# Altium PCB PCB_Capacitive-Soil-Moisture-Sensor_2024-11-25.pcbdoc
Units mil, origin at the board's own origin, x right, y up, seen from the top; angles counter-clockwise.
Board outline 2700 x 9282.02 mil, 2 copper layers (Top Layer, Bottom Layer); 89 components, 70 nets, 363 pads, 106 vias.
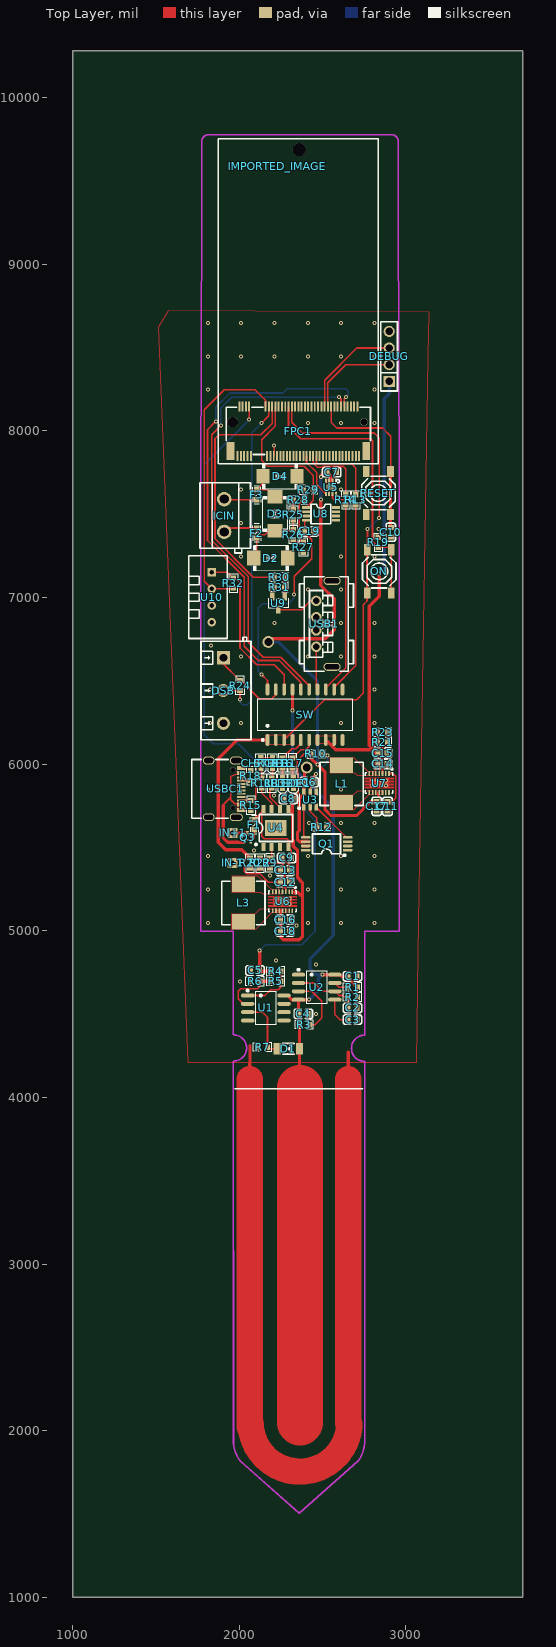
[diagram p0: Top Layer view]
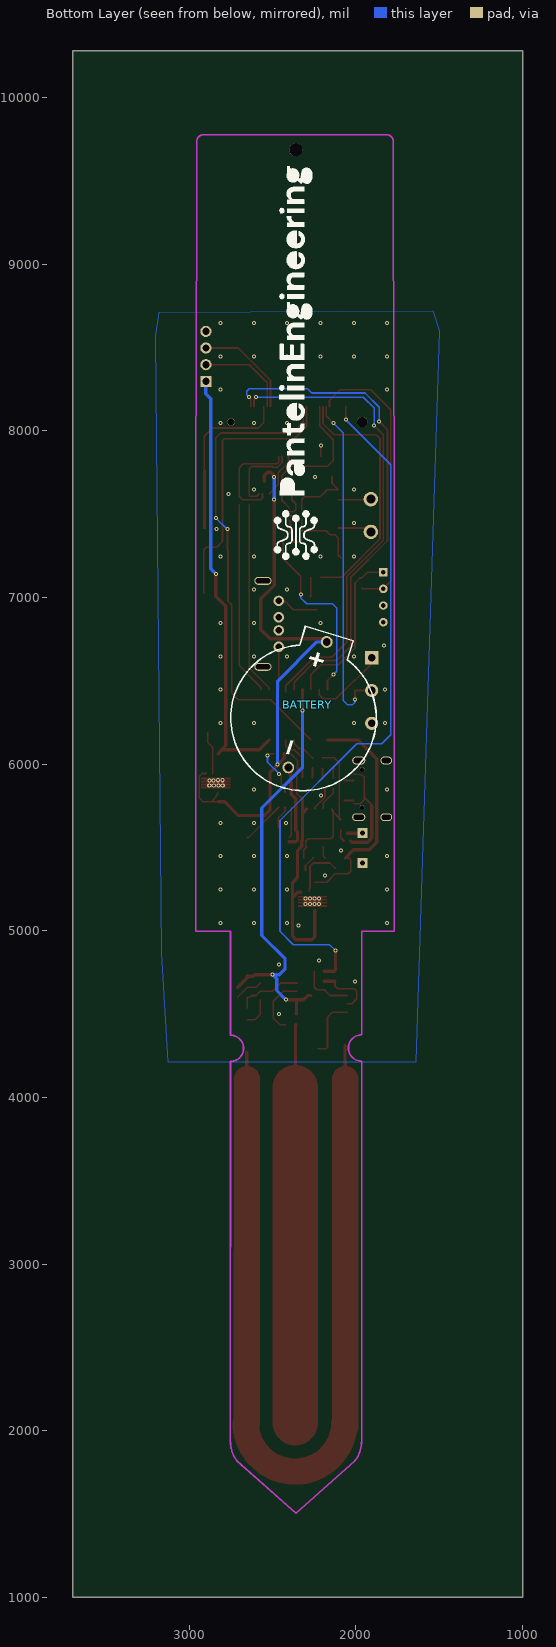
[diagram p1: Bottom Layer view, seen from below]

## Layer stack, top to bottom
Top Layer: signal copper (thickness not stored)
Dielectric: dielectric 12.6, FR-4, Dk 4.8
Bottom Layer: signal copper (thickness not stored)

## Board outline
3700,1000 1000,1000 1000,10282.02 3700,10282.02

## Components (designator, comment, footprint, x,y, rotation, side; value= is the part's Value field where it differs from the comment)
BATTERY "BS-02-A1AJ010" BAT-TH_BS-02-A1AJ010 2290,6357.02 r287 bottom
C1 "100nF" C0603 2680,4727.02 r0 top
C2 "470pF" C0603 2680,4537.02 r0 top
C3 "10nF" C0603 2680,4467.02 r0 top
C4 "100nF" C0603 2385,4502.02 r180 top
C5 "4.7uF" C0603 2095,4762.02 r0 top
C6 "100n" C0603 2420,5892.02 r0 top
C7 "100n" C0603 2555,7752.02 r180 top
C8 "10u" C0603 2295,5792.02 r0 top
C9 "10u" C0603 2285,5437.02 r0 top
C10 "100n" C0603 2910,7392.02 r90 top
C11 "10uF" C0603 2890,5747.02 r90 top
C12 "22u" C0603 2275,5292.02 r180 top
C13 "22u" C0603 2275,5362.02 r180 top
C14 "22u" C0603 2860,6002.02 r180 top
C15 "22u" C0603 2860,6067.02 r180 top
C16 "10u" C0603 2275,5067.02 r0 top
C17 "100n" C0603 2825,5747.02 r270 top
C18 "100n" C0603 2275,4997.02 r0 top
C19 "100n" C0603 2420,7397.02 r0 top
CHRG1 "FC-DA1608BK-470H10" LED0603-RD 2130,6007.02 r90 top
D1 "TCLL4148" LL-34_L3.5-W1.5-RD 2295,4292.02 r0 top
D2 "SMBJ5.0CA_C726851" SMB_L4.6-W3.6-LS5.3-BI 2190,7237.02 r0 top
D3 "SMBJ5.0CA_C726851" SMB_L4.6-W3.6-LS5.3-BI 2215,7502.02 r270 top
D4 "SMBJ5.0CA_C726851" SMB_L4.6-W3.6-LS5.3-BI 2245,7727.02 r180 top
DEBUG "2.54-1*4P母" HDR-TH_4P-P2.54-V-F 2900,8447.02 r90 top
DSB "MX301-5.0-03P-BU01-CU-Y-A" CONN-TH_3P-P5.0-MX301-5.0-03P-BU01-CU-Y-A 1905,6442.02 r270 top
F1 "1.25A" F0603 2090,5637.02 r90 top
F2 "JK-SMD0603-001" F0603 2105,7387.02 r270 top
F3 "JK-SMD0603-001" F0603 2105,7617.02 r90 top
FPC1 "AS0BC21-S30BM-7H" CONN-SMD_AS0BC21-S30BM-7H 2355,7997.02 r180 top
ICIN "VLT" CONN-TH_P5.00_KF301-5.0-2P 1910,7492.02 r270 top
IMPORTED_IMAGE "IMPORTED_IMAGE" IMPORTED_IMAGE 2228.28,9588.14 r0 top
IN+1 "Pad 01" CON_PAD_SQUARE_32MIL 1960,5587.02 r0 top
IN-1 "Pad 02" CON_PAD_SQUARE_32MIL 1960,5407.02 r0 top
L1 "1.5u" IND-SMD_L7.2-W6.6_GPSR0730 2615,5882.02 r270 top
L3 "1.5uH" IND-SMD_L7.2-W6.6_GPSR0730 2025,5167.02 r270 top
LEDB1 "FC-DA1608BK-470H10" LED0603-RD 2260,5887.02 r90 top
LEDE1 "XL-1608UGC-04" LED0603-RD_GREEN 2325,5887.02 r90 top
ON "TS-1187A-B-A-B" SW-SMD_4P-L5.1-W5.1-P3.70-LS6.5-TL-2 2840,7157.02 r90 top
Q1 "FS8205A" TSSOP-8_L4.4-W3.5-P0.65-LS6.4-BL 2525,5522.02 r90 top
Q3 "NTA4151PT1G" SOT-416_L1.6-W0.8-P1.00-LS1.6-BR 2050,5562.02 r270 top
R1 "1.5kΩ" R0603 2680,4662.02 r0 top
R2 "2.4kΩ" R0603 2680,4602.02 r0 top
R3 "10kΩ" R0603 2390,4437.02 r0 top
R4 "100Ω" R0603 2220,4757.02 r0 top
R5 "0Ω" R0603 2220,4697.02 r0 top
R6 "DNP" R0603 2095,4697.02 r0 top
R7 "1MΩ" R0603 2140,4302.02 r0 top
R8 "1k" R0603 2195,5887.02 r270 top
R9 "1.6k" R0603 2185,5407.02 r90 top
R10 "100" R0603 2460,6062.02 r180 top
R11 "1k" R0603 2135,5887.02 r270 top
R12 "1k" R0603 2495,5622.02 r0 top
R13 "10k" R0603 2700,7587.02 r270 top
R14 "10k" R0603 2640,7587.02 r270 top
R15 "5.1kΩ" R0603 2070,5752.02 r90 top
R16 "49.9" R0603 2260,6007.02 r90 top
R17 "49.9" R0603 2320,6007.02 r90 top
R18 "5.1kΩ" R0603 2070,5932.02 r270 top
R19 "430" R0603 2835,7332.02 r270 top
R20 "1M" R0603 2065,5407.02 r270 top
R21 "1.6M" R0603 2860,6132.02 r0 top
R22 "180k" R0603 2125,5407.02 r270 top
R23 "180k" R0603 2860,6192.02 r0 top
R24 "4.7kΩ" R0603 2005,6472.02 r90 top
R25 "120Ω" R0603 2325,7497.02 r270 top
R26 "100kΩ" R0603 2325,7377.02 r90 top
R27 "100kΩ" R0603 2385,7302.02 r90 top
R28 "100kΩ" R0603 2355,7587.02 r0 top
R29 "100kΩ" R0603 2415,7647.02 r180 top
R30 "220" R0603 2240,7122.02 r0 top
R31 "10k" R0603 2240,7062.02 r0 top
R32 "4.7kΩ" R0603 1965,7087.02 r270 top
RESET "TS-1187A-B-A-B" SW-SMD_4P-L5.1-W5.1-P3.70-LS6.5-TL-2 2835,7627.02 r270 top
STDB1 "FC-DA1608HRK-620D" LED0603-RD_RED 2200,6007.02 r90 top
SW "DSHP10TS-S" SW-SMD_DSHP10TS-S 2395,6297.02 r0 top
U1 "LMV358IDR" SOIC-8_L4.9-W3.9-P1.27-LS6.0-BL 2160,4537.02 r270 top
U2 "NE555" SOIC-8_L4.9-W3.9-P1.27-LS6.0-BL 2465,4662.02 r270 top
U3 "DW01A" SOT-23-6_L2.9-W1.6-P0.95-LS2.8-BL 2425,5787.02 r0 top
U4 "TP4056" ESOP-8_L4.9-W3.9-P1.27-LS6.0-BL-EP 2220,5617.02 r0 top
U5 "MAX17048" DFN-8 2550,7662.02 r180 top
U6 "TPS63020DSJR" VSON-14_L4.0-W3.0-P0.50-BL-EP_TI_DSJ 2260,5177.02 r180 top
U7 "TPS63020DSJR" VSON-14_L4.0-W3.0-P0.50-BL-EP_TI_DSJ 2840,5887.02 r180 top
U8 "TP5552-VR" SOP-8_L3.0-W3.0-P0.65-LS4.9-BL 2490,7502.02 r270 top
U9 "IRLML6244TR" SOT-23-3_L2.9-W1.3-P1.90-LS2.4-BR 2235,6967.02 r90 top
U10 "DHT11" SENSOR-TH_DHT11 1835,7002.02 r270 top
USB1 "AF 180°ZJB13.7" USB-A-TH_AF-ZJB13.7 2510,6842.02 r90 top
USBC1 "TYPE-C-31-M-12" USB-C_SMD-TYPE-C-31-M-12 1915,5852.02 r270 top

## Footprints (in the part's own frame and the unit in brackets; to place one, negate y for a bottom-side part, rotate by r counter-clockwise, add the part's x,y. Pads: shape width x height; smd on the part's side, far side on the other; paste and mask are expansions set on the pad)
BAT-TH_BS-02-A1AJ010 [mm]
  round 1.8 hole 1.2 paste+0 mask+0.051: 1(10,0) 2(-10,0)
  silkscreen extent -11.36,-11.09 13.19,11.09
C0603 [mm]
  rect 0.8x0.9 smd paste+0 mask+0.051: 1(-0.7,0) 2(0.7,0)
  silkscreen extent -1.41,-0.71 1.39,0.72
CON_PAD_SQUARE_32MIL [mil]
  rect 60x60 hole 32 paste+0 mask+2: P(0,0)
CONN-SMD_AS0BC21-S30BM-7H [mm]
  rect 0.3x1.55 smd paste+0 mask+0.05: 1(9.25,3.775) 2(9,-3.775) 3(8.75,3.775) 4(8.5,-3.775) 5(8.25,3.775) 6(8,-3.775) 7(7.75,3.775) 8(7.5,-3.775) 9(7.25,3.775) 18(5,-3.775) 19(4.75,3.775) 20(4.5,-3.775) 21(4.25,3.775) 22(4,-3.775) 23(3.75,3.775) 24(3.5,-3.775) 25(3.25,3.775) 26(3,-3.775) 27(2.75,3.775) 28(2.5,-3.775) 29(2.25,3.775) 30(2,-3.775) 31(1.75,3.775) 32(1.5,-3.775) 33(1.25,3.775) 34(1,-3.775) 35(0.75,3.775) 36(0.5,-3.775) 37(0.25,3.775) 38(0,-3.775) 39(-0.25,3.775) 40(-0.5,-3.775) 41(-0.75,3.775) 42(-1,-3.775) 43(-1.25,3.775) 44(-1.5,-3.775) 45(-1.75,3.775) 46(-2,-3.775) 47(-2.25,3.775) 48(-2.5,-3.775) 49(-2.75,3.775) 50(-3,-3.775) 51(-3.25,3.775) 52(-3.5,-3.775) 53(-3.75,3.775) 54(-4,-3.775) 55(-4.25,3.775) 56(-4.5,-3.775) 57(-4.75,3.775) 58(-5,-3.775) 59(-5.25,3.775) 60(-5.5,-3.775) 61(-5.75,3.775) 62(-6,-3.775) 63(-6.25,3.775) 64(-6.5,-3.775) 65(-6.75,3.775) 66(-7,-3.775) 67(-7.25,3.775) 68(-7.5,-3.775) 69(-7.75,3.775) 70(-8,-3.775) 71(-8.25,3.775) 72(-8.5,-3.775) 73(-8.75,3.775) 74(-9,-3.775) 75(-9.25,3.775)
  rect 1.2x2.75 smd paste+0 mask+0.05: 76(-10.35,3) 77(10.35,3)
  round 1.1 hole 1.1 unplated paste+0: ""(-10,-1.42)
  round 1.6 hole 1.6 unplated paste+0: ""(10,-1.42)
  silkscreen extent -11,-3.67 11,3.53
CONN-TH_3P-P5.0-MX301-5.0-03P-BU01-CU-Y-A [mm]
  rect 2x2 hole 1.2 paste+0 mask+0.051: 1(-5,0)
  round 2 hole 1.2 paste+0 mask+0.051: 2(0,0) 3(5,0)
  silkscreen extent -8.1,-3.4 7.5,4.2
CONN-TH_P5.00_KF301-5.0-2P [mm]
  round 2.2 hole 1.4 paste+0 mask+0.051: 1(-2.5,0) 2(2.5,0)
  silkscreen extent -5,-3.7 5.71,4
DFN-8 [mil]
  rect 11.8x27.6 smd paste+0 mask+2: P$1(-30,-39) P$2(-10,-39) P$3(10,-39) P$4(30,-39) P$5(30,39) P$6(10,39) P$7(-10,39) P$8(-30,39)
  rect 54.3x31.5 smd paste+0 mask+2: P$9(0,0)
  silkscreen extent -52,-46 -32,-26
ESOP-8_L4.9-W3.9-P1.27-LS6.0-BL-EP [mm]
  rect 0.6x1.2 smd paste+0 mask+0.051: 1(-1.905,-2.908) 2(-0.635,-2.908) 3(0.635,-2.908) 4(1.905,-2.908) 5(1.905,2.908) 6(0.635,2.908) 7(-0.635,2.908) 8(-1.905,2.908)
  rect 3.3x2.4 smd paste+0 mask+0.051: 9(0,0)
  silkscreen extent -3.2,-2.67 2.55,2.05
F0603 [mil]
  rect 31.75x34.02 smd paste-3937.01 mask+2: 1(-29.66,0) 2(29.65,0)
  silkscreen extent -55,-25 55,25
HDR-TH_4P-P2.54-V-F [mm]
  rect 1.7x1.7 hole 1.1 paste+0 mask+0.051: 1(-3.81,0)
  round 1.7 hole 1.1 paste+0 mask+0.051: 2(-1.27,0) 3(1.27,0) 4(3.81,0)
  silkscreen extent -5.29,-1.27 5.29,1.27
IMPORTED_IMAGE [mil]
IND-SMD_L7.2-W6.6_GPSR0730 [mm]
  rect 2.35x3.5 smd paste+0 mask+0.051: 1(-2.85,0) 2(2.85,0)
  silkscreen extent -3.3,-3.3 3.3,3.3
LED0603-RD [mm]
  rect 0.8x0.8 smd paste+0 mask+0.051: 1(-0.799,-0.003) 2(0.799,0.004)
  silkscreen extent -1.49,-0.75 1.39,0.76
LED0603-RD_GREEN [mm]
  rect 0.8x0.8 smd paste+0 mask+0.051: 1(-0.799,-0.003) 2(0.799,0.004)
  silkscreen extent -1.49,-0.75 1.39,0.76
LED0603-RD_RED [mm]
  rect 0.8x0.8 smd paste+0 mask+0.051: 1(-0.799,-0.003) 2(0.799,0.004)
  silkscreen extent -1.49,-0.75 1.39,0.76
LL-34_L3.5-W1.5-RD [mm]
  rect 1.1x1.7 smd paste+0 mask+0.051: 1(-1.7,0) 2(1.7,0)
  silkscreen extent -0.9,-0.8 0.9,0.8
R0603 [mil]
  rect 31.75x34.02 smd paste-3937.01 mask+2: 1(-29.66,0) 2(29.66,0)
  silkscreen extent -55,-26 55,26
SENSOR-TH_DHT11 [mil]
  rect 51x51 hole 28 paste+0 mask+2: 1(-150,0)
  round 51 hole 28 paste+0 mask+2: 2(-50,0) 3(50,0) 4(150,0)
  silkscreen extent -248,-138 248,93
SMB_L4.6-W3.6-LS5.3-BI [mil]
  rect 80.61x88.23 smd paste+0 mask+2: 1(-102.02,0) 2(102.02,0)
  silkscreen extent -105,-75 108,75
SOIC-8_L4.9-W3.9-P1.27-LS6.0-BL [mm]
  oval 0.588x2.045 smd paste+0 mask+0.051: 1(-1.905,-2.773) 2(-0.635,-2.773) 3(0.635,-2.773) 4(1.905,-2.773) 5(1.905,2.773) 6(0.635,2.773) 7(-0.635,2.773) 8(-1.905,2.773)
  silkscreen extent -2.8,-2.92 2.53,1.52
SOP-8_L3.0-W3.0-P0.65-LS4.9-BL [mm]
  rect 0.406x1.3 smd paste+0 mask+0.051: 1(-0.975,-2.25) 2(-0.325,-2.25) 3(0.325,-2.25) 4(0.975,-2.25) 5(0.975,2.25) 6(0.325,2.25) 7(-0.325,2.25) 8(-0.975,2.25)
  silkscreen extent -1.82,-2.66 1.52,1.51
SOT-23-3_L2.9-W1.3-P1.90-LS2.4-BR [mm]
  rect 1.25x0.7 smd paste+0 mask+0.051: 1(1,-0.95) 2(1,0.95) 3(-1,0)
  silkscreen extent -0.73,-1.53 0.73,1.53
SOT-23-6_L2.9-W1.6-P0.95-LS2.8-BL [mm]
  rect 0.532x1.072 smd paste+0 mask+0.051: 1(-0.95,-1.149) 2(0,-1.149) 3(0.95,-1.149) 4(0.95,1.149) 5(0,1.149) 6(-0.95,1.149)
  silkscreen extent -1.82,-1.45 1.54,0.89
SOT-416_L1.6-W0.8-P1.00-LS1.6-BR [mm]
  rect 0.7x0.4 smd paste+0 mask+0.051: 1(0.6,-0.508) 2(0.6,0.508) 3(-0.6,0)
  silkscreen extent -0.4,-0.85 0.4,0.85
SW-SMD_4P-L5.1-W5.1-P3.70-LS6.5-TL-2 [mm]
  rect 1.7x1 smd paste+0 mask+0.051: 1(-3.3,1.85) 2(3.3,1.85) 3(-3.3,-1.85) 4(3.3,-1.85)
  silkscreen extent -2.55,-2.55 2.55,2.55
SW-SMD_DSHP10TS-S [mm]
  oval 0.56x1.84 smd paste+0 mask+0.051: 1(-5.715,-3.845) 2(-4.445,-3.845) 3(-3.175,-3.845) 4(-1.905,-3.845) 5(-0.635,-3.845) 6(0.635,-3.845) 7(1.905,-3.845) 8(3.175,-3.845) 9(4.445,-3.845) 10(5.715,-3.845) 11(5.715,3.845) 12(4.445,3.845) 13(3.175,3.845) 14(1.905,3.845) 15(0.635,3.845) 16(-0.635,3.845) 17(-1.905,3.845) 18(-3.175,3.845) 19(-4.445,3.845) 20(-5.715,3.845)
  silkscreen extent -7.23,-4 7.23,2.45
TSSOP-8_L4.4-W3.5-P0.65-LS6.4-BL [mm]
  oval 0.4x1.5 smd paste+0 mask+0.051: 1(-0.975,-3.2) 2(-0.325,-3.2) 3(0.325,-3.2) 4(0.975,-3.2) 5(0.975,3.2) 6(0.325,3.2) 7(-0.325,3.2) 8(-0.975,3.2)
  silkscreen extent -1.89,-2.87 1.5,2.16
USB-A-TH_AF-ZJB13.7 [mm]
  round 1.6 hole 1 paste+0 mask+0.051: 1(-3.5,1.2) 2(-1,1.2) 3(1,1.2) 4(3.5,1.2)
  oval 1.2x2.6 hole 0.8 slot 2.2 at 90 deg paste+0 mask+0.051: 5(-6.55,-1.2) 5(6.55,-1.2)
  silkscreen extent -7.2,-4.47 7.2,3.76
USB-C_SMD-TYPE-C-31-M-12 [mm]
  oval 1.2x2 hole 0.8 slot 1.6 at 90 deg paste+0 mask+0.051: 0(-4.325,1.716) 1(4.325,1.716)
  oval 1.2x1.8 hole 0.8 slot 1.4 at 90 deg paste+0 mask+0.051: 2(4.325,-2.484) 3(-4.325,-2.484)
  rect 0.3x1.3 smd paste-100 mask+0.051: A1(-3.35,2.484) A4(-2.55,2.484) A5(-1.25,2.484) A6(-0.25,2.484) A7(0.25,2.484) A8(1.25,2.484) A9(2.55,2.484) A12(3.35,2.484) B1(3.05,2.484) B4(2.25,2.484) B5(1.75,2.484) B6(0.75,2.484) B7(-0.75,2.484) B8(-1.75,2.484) B9(-2.25,2.484) B12(-3.05,2.484)
  round 0.75 hole 0.75 unplated paste+0: ""(-2.9,1.216) ""(2.9,1.216)
  silkscreen extent -4.47,-5.08 4.47,0.5
VSON-14_L4.0-W3.0-P0.50-BL-EP_TI_DSJ [mm]
  rect 0.25x0.7 smd paste+0 mask+0.051: 1(-1.5,-1.45) 2(-1,-1.45) 3(-0.5,-1.45) 4(0,-1.45) 5(0.5,-1.45) 6(1,-1.45) 7(1.5,-1.45) 8(1.5,1.45) 9(1,1.45) 10(0.5,1.45) 11(0,1.45) 12(-0.5,1.45) 13(-1,1.45) 14(-1.5,1.45)
  Top Layer region: -2.2,0.79 -2.2,0.59 -1.43,0.59 -1.43,0.33 -2.2,0.33 -2.2,0.13 -1.43,0.13 -1.43,-0.13 -2.2,-0.13 -2.2,-0.33 -1.43,-0.33 -1.43,-0.59 -2.2,-0.59 -2.2,-0.79 2.2,-0.79 2.2,-0.59 1.43,-0.59 1.43,-0.33 2.2,-0.33 2.2,-0.13 1.43,-0.13 1.43,0.13 2.2,0.13 2.2,0.33 1.43,0.33 1.43,0.59 2.2,0.59 2.2,0.79
  silkscreen extent -2.1,-2.23 2.1,1.6

## Free pads (board coordinates)
  round 78.74 hole 78.74 unplated paste+0: ""(2360,9687.02)

## Via types
v1: diameter 24.02, hole 12.01, Top Layer to Bottom Layer, tented both sides, 57 vias
v2: diameter 24.41, hole 12.2, Top Layer to Bottom Layer, tented both sides, 49 vias

## Nets (pads, with @x,y where several pads share a name; then routed paths per layer and width w, separated by ;. In a path a pad name is that pad's centre, name@x,y a point inside that pad or via, vN(x,y) a via of type N, cw(c..) or ccw(c..) an arc to the next point about the centre after c; other vN are vias at no path point)
+5V: C14.2 C15.2 DEBUG.1 R21.1 SW.7 SW.8 SW.9 U7.4 U7.5 | length 2611.4
  Top Layer w19.68: SW.8 2578.62,6087.02 2805,6087.02 ; C15.2@2825,6062.02 2805,6087.02 ; v2(2840,7142.02) 2840,7007.02 2780,6947.02 2780,6112.02 2805,6087.02
  Bottom Layer w19.68: v2(2840,7142.02) 2870,7172.02 2870,8192.02 2900,8222.02 DEBUG.1
+5V_PMP: SW.14 USB1.1 | length 258.8
  Top Layer w10: USB1.1 2462.76,6455.64 SW.14
BATT_ALERT: FPC1.43 U5.P$5 | length 273.4
  Top Layer w10: FPC1.43 2404.2,7810.52 2465,7749.72 2465,7678.02 U5.P$5
BUT: FPC1.32 ON.3 ON.4 R19.2 | length 1656.7
  Top Layer w10: FPC1.32 2295.9,8026.12 2370,7952.02 2790,7952.02 2800,7942.02 2800,7337.32 R19.2@2835,7302.32 ; R19.2 2897.42,7302.36 ON.4 ON.3
CC1: R18.2 USBC1.A5 | length 57.7
  Top Layer w10: USBC1.A5 2013.93,5902.36 R18.2
CC2: R15.2 USBC1.B5 | length 57.8
  Top Layer w10: USBC1.B5 2014.24,5781.68 R15.2
CHRG1_1: CHRG1.1 R11.1 | length 60.9
  Top Layer w10: CHRG1.1 2135,5970.68 R11.1
CHRG1_2: C9.2 CHRG1.2 F1.2 STDB1.2 U4.4 U4.8 | length 1005.1
  Top Layer w10: CHRG1.2 STDB1.2 ; CHRG1.2 2100,6008.62 2100,5666.72 F1.2 2145,5721.68 U4.8 2135,5721.52 2135,5567.02 2150,5552.02 2285,5552.02 2300,5537.02 U4.4@2300,5502.52 ; U4.4 2312.56,5484.96 C9.2
DHT: FPC1.18 R32.2 U10.2 | length 1708.1
  Top Layer w10: R32.2 1959.66,7052.02 U10.2 1790,7097.02 1790,8127.02 1910,8247.02 2095,8247.02 2158.1,8183.92 FPC1.18@2158.1,8145.62
DSB: DSB.2 FPC1.20 R24.1 | length 2063.1
  Top Layer w10: DSB.2 R24.1@2005,6442.32 ; v2(2005,6387.02) R24.1 ; v2(2135,8047.02) 2177.83,8089.85 FPC1.20
  Bottom Layer w10: v2(2005,6387.02) 2005,6372.02 2020,6357.02 2050,6357.02 2075,6382.02 2075,7987.02 v2(2135,8047.02)
EN: C10.2 FPC1.58 RESET.1 RESET.2 | length 1037.3
  Top Layer w10: FPC1.58@2551.9,8145.62 2551.9,8050.12 2585,8017.02 2860,8017.02 2910,7967.02 2910,7759.12 RESET.1
  Top Layer w19.68: RESET.1 RESET.2 2907.84,7421.74 C10.2
F2_2: D2.1 D3.2 F2.2 R25.2 R26.2 | length 428.5
  Top Layer w10: D2.1 2105,7254.04 F2.2 2124.66,7377.02 2155,7377.02 2177.98,7400 D3.2 2318.32,7400 R26.2 R25.2
F3_2: D3.1 D4.2 F3.2 R25.1 R28.1 | length 401.4
  Top Layer w10: D4.2 2142.98,7684.66 F3.2 2172.36,7646.68 D3.1 2308.32,7604.04 R28.1 ; R25.1 R28.1
GND: C1.2 C2.2 C3.2 C4.1 C5.1 C7.1 C8.1 C9.1 C10.1 C11.1 C12.1 C13.1 C14.1 C15.1 C16.2 C17.2 C18.2 C19.2 D2.2 D4.1 DEBUG.4 DSB.3 FPC1.23 IN-1.P LEDB1.1 LEDE1.1 Q1.2 Q1.3 R6.1 R7.1 R9.1 R12.2 R15.1 R18.1 R19.1 R22.1 R23.1 R27.1 R31.1 RESET.3 RESET.4 U1.4 U2.1 U4.1 U4.3 U5.P$1 U5.P$4 U5.P$6 U5.P$9 U6.2 U6.13 U7.2 U7.13 U8.8 U9.2 U10.4 USBC1.0 USBC1.1 USBC1.2 USBC1.3 USBC1.A1 USBC1.A12 USBC1.B1 USBC1.B12 | length 5591.4
  Top Layer w10: FPC1.23 2210,7851.04 v2(2210,7912.02) ; C9.1 2302.56,5391.9 C13.1
  Top Layer w19.68: 2063.84,4110.06 2065,4312.02 ; 2653.84,4110.06 2655,4272.02
  Top Layer w157.48: 2063.84,2024.68 2063.84,4110.06 ; 2068.57,2051.84 ccw(c2364.99,2051.74) 2661.23,2041.08 ; 2653.84,4110.06 2655,2047.02
  other v1: 1812.21,5047.52 2412.21,5047.52 2612.21,5047.52 2812.21,5047.52 1812.21,5247.52 2412.21,5247.52 2612.21,5247.52 2812.21,5247.52 1812.21,5447.52 2412.21,5447.52 2612.21,5447.52 2812.21,5447.52 2420,5647.02 2612.21,5647.52 2812.21,5647.52 1812.21,5847.52 2612.21,5847.52 1825,6247.02 2012.21,6247.52 2612.21,6247.52 2812.21,6247.52 1825,6447.02 2812.21,6447.52 2012.21,6647.52 2412.21,6647.52 2612.21,6647.52 2812.21,6647.52 1830,6712.02 2212.21,6847.52 2612.21,6847.52 2812.21,6847.52 2412.21,7047.52 2612.21,7047.52 2012.21,7247.52 2212.21,7247.52 2612.21,7247.52 2812.21,7247.52 2012.21,7447.52 2012.21,7647.52 2612.21,7647.52 2412.21,8047.52 2612.21,8047.52 2812.21,8047.52 1812.21,8247.51 2812.21,8247.51 1812.21,8447.51 2012.21,8447.51 2212.21,8447.51 2412.21,8447.51 2612.21,8447.51 2812.21,8447.51 1812.21,8647.51 2012.21,8647.51 2212.21,8647.51 2412.21,8647.51 2612.21,8647.51 2812.21,8647.51
  other v2: 2460,4502.02 2005,4697.02 2460,4797.02 2220,4822.02 2345,5032.02 2221.04,5160.39 2275.04,5160.39 2248.54,5160.89 2301.04,5160.89 2248.04,5192.89 2275.04,5193.39 2301.54,5192.89 2220.54,5193.89 2185,5332.02 2090,5482.02 2210,5812.02 2825.1,5871.27 2798.78,5871.54 2852.73,5872.06 2879.57,5872.59 2852.99,5902.85 2879.31,5902.85 2799.83,5903.64 2826.41,5903.64 2835,7412.02 2765,7622.02 2245,7722.02
GPIO38: R16.2 SW.5 | length 169
  Top Layer w10: R16.2 2315.34,6092.02 2340,6092.02 2370,6122.02 SW.5
GPIO39: R17.2 SW.6 | length 167.8
  Top Layer w10: R17.2 2370.34,6087.02 2400,6087.02 2420,6107.02 SW.6
ICIN_1: F3.1 ICIN.1 | length 196.3
  Top Layer w10: ICIN.1 1913.08,7587.36 F3.1
ICIN_2: F2.1 ICIN.2 | length 204.6
  Top Layer w10: ICIN.2 1933.09,7416.68 F2.1
L1_1: L1.1 U7.6 U7.7
L1_2: L1.2 U7.8 U7.9
L3_1: L3.1 U6.6 U6.7
L3_2: L3.2 U6.8 U6.9
LEDB: FPC1.66 SW.16 | length 2967.8
  Top Layer w10: v2(1860,8057.02) 1810,8007.02 1810,7342.02 2030,7122.02 2030,6707.02 2115,6622.02 2240,6622.02 2370,6492.02 SW.16 ; FPC1.66 2630.59,8192.61 v2(2640,8202.02)
  Bottom Layer w10: v2(1860,8057.02) 1860,8142.02 1945,8227.02 2265,8227.02 2290,8252.02 2640,8252.02 2655,8237.02 2655,8217.02 v2(2640,8202.02)
LEDE: FPC1.64 SW.15 | length 2830.5
  Top Layer w10: v2(1890,8032.02) 1835,7977.02 1835,7342.02 2055,7125.62 2055,6730.62 2145,6640.62 2250,6640.62 2420,6470.62 SW.15@2420,6432.02 ; v2(2600,8202.02) 2610.9,8191.12 FPC1.64
  Bottom Layer w10: v2(1890,8032.02) 1890,8137.02 1955,8202.02 v2(2600,8202.02)
OC: Q1.4 U3.3 | length 263.7
  Top Layer w10: U3.3 2643.8,5560.42 Q1.4
OD: Q1.5 U3.1 | length 186.1
  Top Layer w10: U3.1 2387.6,5571.82 Q1.5
P+: IN+1.P Q3.3 | length 90.6
  Top Layer w19.68: IN+1.P 1961.38,5585.64 Q3.3
Q3_2: F1.1 Q3.2 | length 77.2
  Top Layer w10: Q3.2 2090,5558.4 F1.1
R3_1: D1.2 R3.1 | length 2387.9
  Top Layer w19.68: R3.1 2361.93,4435.43 D1.2 2361.93,4060.39 2363.84,4058.48
  Top Layer w275.59: 2363.84,2050.61 2363.84,4058.48
R8_1: R8.1 STDB1.1 | length 61
  Top Layer w10: R8.1 2200.14,5921.82 STDB1.1
R8_2: R8.2 U4.6 | length 160.7
  Top Layer w10: R8.2@2195,5857.32 2185,5857.32 2185,5802.02 2245,5742.02 U4.6
R10_1: C6.2 R10.1 U3.5 | length 307.7
  Top Layer w10: U3.5 2425,5857.02 2447.56,5879.58 C6.2 2447.56,5929.58 v2(2460,5942.02) ; R10.1 2520,6062.02 v2(2530,6052.02)
  Bottom Layer w10: v2(2460,5942.02) 2530,6012.02 v2(2530,6052.02)
R16_1: LEDB1.2 R16.1 | length 58.9
  Top Layer w10: LEDB1.2 2260,5918.63 R16.1
R17_1: LEDE1.2 R17.1 | length 60.9
  Top Layer w10: R17.1 2320,5923.35 LEDE1.2
R20_2: R20.2 R22.2 U6.3 | length 325.3
  Top Layer w10: R22.2 2155,5407.02 2158,5407.02 2255,5407.02 2275,5387.02 2275,5257.02 2279.7,5252.32 U6.3
R21_2: R21.2 R23.2 U7.3 | length 260.3
  Top Layer w10: U7.3 2859.68,6102.04 R21.2 R23.2
R30_2: R30.2 R31.2 U9.1 | length 116.8
  Top Layer w10: R30.2 R31.2 2269.66,7009.13 U9.1
S$4131: 
S$22309: 
S$37603: 
SCL: FPC1.49 R13.1 U5.P$7 | length 636
  Top Layer w10: FPC1.49 2463.26,7812.02 2473.26,7802.02 2675,7802.02 2700,7777.02 R13.1 2700,7607.02 2680,7587.02 2570,7587.02 2560,7597.02 U5.P$7
SDA: FPC1.47 R14.1 U5.P$8 | length 486.8
  Top Layer w10: FPC1.47 2443.6,7808.42 2470,7782.02 2498.4,7782.02 2502.3,7786.02 2626,7786.02 2640,7772.02 R14.1 2640,7607.02 2595,7607.02 U5.P$8
SIG: C5.2 FPC1.8 R4.1 | length 4193.5
  Top Layer w10: v2(2059.72,8067.02) FPC1.8
  Top Layer w19.68: v2(2122.56,4882.02) C5.2 2127.56,4757.02 R4.1
  Bottom Layer w10: v2(2059.72,8067.02) 1790,7797.32 1790,6177.02 1845,6122.02 1995,6122.02 2455,5662.02 2455,4997.02 2375,4917.02 2157.7,4917.02 v2(2122.56,4882.02)
TRIG: C2.1 R2.1 U2.2 U2.6 | length 400.6
  Top Layer w10: U2.2@2350.85,4687.02 2450,4687.02 2500,4637.02 U2.6 2599.15,4612.02 2625,4612.02 2635,4602.02 R2.1 2652.44,4599.92 C2.1
U0RXD: DEBUG.2 FPC1.56 | length 556.1
  Top Layer w10: FPC1.56 2532.2,8289.22 2640,8397.02 DEBUG.2
U0TXD: DEBUG.3 FPC1.54 | length 626.1
  Top Layer w10: FPC1.54 2512.48,8304.5 2705,8497.02 DEBUG.3
U1_1: R4.2 R5.2 U1.1 | length 314.5
  Top Layer w10: U1.1 2155,4612.02 2190,4647.02 2235,4647.02 2249.66,4662.36 R5.2 R4.2
U1_2: R5.1 R6.2 U1.2 | length 350.9
  Top Layer w10: U1.2 2025,4562.02 1995,4592.02 1995,4637.02 2010,4652.02 2109.4,4652.02 2124.7,4667.32 R6.2
  Top Layer w19.68: R6.2 R5.1
U1_3: D1.1 R7.2 U1.3 | length 374
  Top Layer w10: U1.3 2140,4512.02 2169.66,4482.36 R7.2 2179.66,4292.02 D1.1
U2_3: R3.2 U2.3 | length 355.9
  Top Layer w10: U2.3 2435,4637.02 2495,4577.02 2495,4477.02 2455,4437.02 R3.2
U2_5: C3.1 U2.5 | length 180.2
  Top Layer w10: U2.5 2574.2,4497.82 2605,4467.02 C3.1
U2_7: R1.1 R2.2 U2.7 | length 171.1
  Top Layer w10: U2.7 2599.15,4662.02 R1.1 2709.66,4602.7 R2.2
U3_2: R12.1 U3.2 | length 136.5
  Top Layer w10: U3.2 2425,5717.02 2465.34,5676.68 R12.1
U3_6: BATTERY.1 C6.1 Q1.6 Q1.7 U3.6 | length 510.3
  Top Layer w19.68: U3.6@2387.6,5832.22 2387.6,5819.62 2360,5792.02 2360,5602.02 2350,5592.02 2350,5547.02 2362.2,5534.82 Q1.6 ; U3.6 2387.6,5887.22 C6.1 ; C6.1 2392.44,5967.86 BATTERY.1
U4_2: R9.2 U4.2 | length 70
  Top Layer w10: R9.2 2195,5446.68 U4.2
U4_7: R11.2 U4.7 | length 150.7
  Top Layer w10: R11.2 2135,5827.02 2195,5767.02 U4.7
U8_2: R28.2 R29.2 U8.2 | length 176.7
  Top Layer w10: R28.2 2360,7562.36 2360,7527.02 2372.21,7514.81 U8.2 ; R28.2 R29.2
U8_3: R26.1 R27.2 U8.3 | length 271.6
  Top Layer w10: R26.1 2340.68,7331.68 R27.2 2360,7356.68 2360,7482.02 2367.21,7489.23 U8.3
U9_3: U9.3 USB1.4 | length 249.6
  Top Layer w10: U9.3@2235,6927.62 2375,6927.02 2427.8,6979.82 USB1.4
USB_5V: Q3.1 USBC1.A4 USBC1.A9 USBC1.B4 USBC1.B9 | length 678
  Top Layer w10: 1905,5752.02 1905,5755.94 1950,5800.94 ; USBC1.B4 1973.6,5763.42 1950,5787.02 1950,5927.02 1975,5937.02 USBC1.B9
  Top Layer w19.68: 1905,5752.02 1905,5557.02 1930,5532.02 2023.62,5532.02 Q3.1
VBAT: BATTERY.2 C7.2 C8.2 C11.2 C16.1 C17.1 C18.1 R10.2 U4.5 U5.P$2 U5.P$3 U6.1 U6.10 U6.11 U6.12 U7.1 U7.10 U7.11 U7.12 | length 5077.4
  Top Layer w10: C8.2 2355,5824.46 2355,5942.02 2350,5947.02 2350,6022.02 2390,6062.02 R10.2 ; C17.1 C11.2 2917.56,5774.58 2940,5797.02 2940,5927.02 2922.91,5944.11 U7.1 ; 2830,5827.02 2830,5817.02 2863.7,5774.62
  Top Layer w19.68: BATTERY.2 2193.41,6752.02 2515,6752.02 2570,6807.02 2570,6992.02 2490,7072.02 2490,7542.02 v2(2490,7587.02) ; C18.1 2247.4,4964.62 2265,4947.02 2360,4947.02 2380,4967.02 2380,5202.02 ; C18.1 C16.1 2247.44,5122.02 ; U4.5 2320,5706.52 ; C8.2 2320,5789.46 2320,5706.52 ; 2330,5232.02 2350,5232.02 2380,5202.02 ; R10.2 2430.34,6036.68 v2(2470,5997.02) 2515,5952.02 2515,5727.02 2550,5692.02 2705,5692.02 2787.6,5774.62 C17.1 ; v2(2490,7722.02) 2490,7732.02 2510,7752.02 C7.2 2550,7729.46 2550,7697.02 ; 2320,5706.52 2320,5547.02 2324.71,5542.31 2324.71,5507.31 2329.8,5502.22 2350,5482.02 2350,5322.02 2380,5287.02 2380,5202.02
  Bottom Layer w19.68: BATTERY.2 2233.51,6733.51 2470,6497.02 v2(2470,5997.02) ; v2(2490,7587.02) v2(2490,7722.02)
VCC: C12.2 C13.2 FPC1.34 ON.1 ON.2 R20.1 SW.1 SW.2 SW.3 SW.4 U6.4 U6.5 | length 4246
  Top Layer w10: R20.1 2040.3,5436.72 2030,5426.32 2030,5357.02 2045,5342.02 2125,5342.02 2175,5292.02 C12.2 ; SW.3 2511.38,6387.02 2705,6387.02 2745,6427.02 2745,6957.02 2767.16,6979.18 ON.1 ON.2 2770,7289.78 v2(2770,7412.02) ; FPC1.34 2315.63,8051.39 2380,7987.02 2810,7987.02 2840,7957.02 v2(2840,7477.02)
  Top Layer w19.68: R20.1 2014.7,5487.02 1920,5487.02 1875,5532.02 1875,6032.02 1988.6,6145.62 SW.1
  Bottom Layer w10: v2(2770,7412.02) 2775,7412.02 v2(2840,7477.02)
VCC_CAP: C1.1 C4.2 R1.2 SW.17 U1.8 U2.4 U2.8 | length 2600.6
  Top Layer w19.68: U1.8 2290,4612.02 2315,4587.02 U2.4 ; v2(2320,6322.02) SW.17 ; C4.2 2355.85,4503.61 U2.4 ; v2(2420,4587.02) U2.4 ; v2(2500,4737.02) U2.8 ; U2.8 2604.8,4737.02 2614.8,4727.02 C1.1 ; C1.1 2652.4,4719.22 R1.2
  Bottom Layer w19.68: v2(2320,6322.02) 2320,5982.02 2565,5737.02 2565,4972.02 2425,4832.02 2425,4772.02 2460,4737.02 v2(2500,4737.02) 2475,4712.02 2475,4642.02 v2(2420,4587.02)
VCC_DHT: R32.1 SW.18 U10.1 | length 1006.8
  Top Layer w10: U10.1 1929.66,7152.02 R32.1 1975.3,7116.72 2005,7087.02 2005,6697.02 2105,6597.02 2210,6597.02 2270,6537.02 SW.18
VCC_DSB: DSB.1 R24.2 SW.19 | length 480.8
  Top Layer w10: DSB.1 1905,6601.68 R24.2 2010.3,6501.72 2120,6392.02 2195,6392.02 2220,6417.02 SW.19
VCC_SCL: R13.2 SW.12 | length 1162.8
  Top Layer w10: SW.12 2570,6462.02 2700,6592.02 R13.2
VCC_SDA: R14.2 SW.13 | length 1158.7
  Top Layer w10: SW.13 2520,6457.02 2640,6577.02 2640,6597.02 R14.2
VCC_WTR: C19.1 SW.20 U8.4 | length 1282.7
  Top Layer w10: v2(2135,6537.02) 2170,6502.02 SW.20 ; v2(2330,7017.02) 2330,7127.02 2435,7232.02 2435,7347.02 2392.4,7389.62 C19.1 ; C19.1 2392.44,7454.65 U8.4
  Bottom Layer w10: v2(2135,6537.02) 2115,6557.02 2115,6937.02 2140,6962.02 2295,6962.02 2330,6997.02 v2(2330,7017.02)
WTR: FPC1.22 R30.1 | length 1532.5
  Top Layer w10: FPC1.22 2197.5,8044.52 2130,7977.02 1880,7977.02 1855,7952.02 1855,7352.02 2085,7122.02 R30.1
WTR_LVL: FPC1.24 R29.1 U8.1 | length 914.3
  Top Layer w10: FPC1.24 2217.2,8029.22 2135,7947.02 2135,7822.02 2170,7787.02 2390,7787.02 2444.7,7732.32 R29.1 ; U8.1 2444.66,7583.65 R29.1
pads on no net: FPC1. FPC1.1 FPC1.2 FPC1.3 FPC1.4 FPC1.5 FPC1.6 FPC1.7 FPC1.9 FPC1.19 FPC1.21 FPC1.25 FPC1.26 FPC1.27 FPC1.28 FPC1.29 FPC1.30 FPC1.31 FPC1.33 FPC1.35 FPC1.36 FPC1.37 FPC1.38 FPC1.39 FPC1.40 FPC1.41 FPC1.42 FPC1.44 FPC1.45 FPC1.46 FPC1.48 FPC1.50 FPC1.51 FPC1.52 FPC1.53 FPC1.55 FPC1.57 FPC1.59 FPC1.60 FPC1.61 FPC1.62 FPC1.63 FPC1.65 FPC1.67 FPC1.68 FPC1.69 FPC1.70 FPC1.71 FPC1.72 FPC1.73 FPC1.74 FPC1.75 FPC1.76 FPC1.77 Q1.1 Q1.8 SW.10 SW.11 U1.5 U1.6 U1.7 U3.4 U4.9 U6.14 U7.14 U8.5 U8.6 U8.7 U10.3 USB1.2 USB1.3 USB1.5 USBC1. USBC1.A6 USBC1.A7 USBC1.A8 USBC1.B6 USBC1.B7 USBC1.B8

## Polygon pours and split planes (outlines as drawn)
GND on Bottom Layer (solid): 1640,4212.02 3125,4212.02 3165,4864.52 3200,8567.02 3180,8712.02 1540,8722.02 1500,8602.02
L3_2 on Top Layer (solid): 2095,5007.02 1955,5007.02 1955,5102.02 2095,5102.02 2125,5132.02 2225,5132.02 2225,5107.02 2195,5107.02 2095,5007.02
L3_1 on Top Layer (solid): 2095,5327.02 1955,5327.02 1955,5232.02 2095,5232.02 2130,5232.02 2140,5222.02 2225,5222.02 2225,5247.02 2195,5247.02 2115,5327.02 2095,5327.02
VBAT on Top Layer (solid): 2235,5132.02 2285,5132.02 2285,5107.02 2235,5107.02
VBAT on Top Layer (solid): 2315,5247.02 2315,5222.02 2325,5222.02 2340,5222.02 2340,5247.02
VCC on Top Layer (solid): 2235,5377.02 2260,5377.02 2260,5312.02 2260,5277.02 2235,5277.02
VCC on Top Layer (solid): 2235,5307.02 2235,5222.02 2260,5222.02 2260,5267.02 2260,5272.02 2260,5307.02 2235,5307.02
R20_2 on Top Layer (solid): 2050,5392.02 2140,5392.02 2140,5362.02 2050,5362.02
USB_5V on Top Layer (solid): 1987.5,5767.02 2032.5,5767.02 2032.5,5747.02 1987.5,5747.02
USB_5V on Top Layer (solid): 1987.5,5957.02 2032.5,5957.02 2032.5,5937.02 1987.5,5937.02
VCC on Top Layer (solid): 2160,6177.02 2330,6177.02 2330,6117.02 2160,6117.02
GND on Top Layer (solid): 1987.5,5737.02 2032.5,5737.02 2032.5,5717.02 1987.5,5717.02
GND on Top Layer (solid): 1990,5987.02 2035,5987.02 2035,5967.02 1990,5967.02
U3_6 on Top Layer (solid): 2375,5542.02 2375,5502.02 2420,5502.02 2420,5542.02
+5V on Top Layer (solid): 2460,6172.02 2580,6172.02 2580,6122.02 2460,6122.02
+5V on Top Layer (solid): 2815,5982.02 2815,6062.02 2815,6147.02 2840,6147.02 2840,6107.02 2840,6067.02 2840,6022.02 2840,5982.02 2840,5957.02 2840,5932.02 2815,5932.02
VBAT on Top Layer (solid): 2535,7712.02 2565,7712.02 2565,7687.02 2535,7687.02
VBAT on Top Layer (solid): 2820,5842.02 2860,5842.02 2860,5822.02 2865,5817.02 2820,5817.02
L1_1 on Top Layer (solid): 2545,6042.02 2685,6042.02 2770,5957.02 2805,5957.02 2805,5932.02 2775,5932.02 2710,5932.02 2695,5947.02 2545,5947.02
L1_2 on Top Layer (solid): 2685,5722.02 2545,5722.02 2545,5817.02 2680,5817.02 2685,5817.02 2710,5842.02 2805,5842.02 2805,5817.02 2775,5817.02 2775,5812.02 2685,5722.02
GND on Top Layer (solid): 1690,4212.02 3065,4212.02 3075,4867.02 3135,8447.02 3140,8712.02 1575,8722.02 1515,8622.02

## Keep-outs
Keep-Out Layer:
  lines w10: 1775.32,9737.33 cw(c1814.68,9737.33) 1814.68,9776.7 ; 1965.62,1939.17 ccw(c2164.29,1939.13) 2005.33,1819.96 ; 1965.63,4218.28 ccw(c1965.63,4297.02) 1965.63,4375.76 ; 2713.99,1819.96 ccw(c2554.83,1938.05) 2753.01,1939.07 ; 2752.55,4216.39 cw(c2752.55,4295.13) 2752.55,4373.87 ; 2915.32,9776.7 cw(c2915.32,9737.33) 2954.68,9737.33

## Silkscreen, mask and mechanical layers (free items; w line width, h text height)
Top Overlay:
  lines w10 net S$22309: 1875,7802.02 1875,9752.02 2835,9752.02 2835,7802.02 1880,7802.02
  lines w10 net S$37603: 1975,4052.02 2740,4052.02